# Altium PCB PCB2.PcbDoc (part 2 of 2)
Units mm, origin at the board's own origin, x right, y up, seen from the top; angles counter-clockwise.
Board outline 150 x 116.5 mm, 2 copper layers (Top Layer, Bottom Layer); 107 components, 88 nets, 407 pads, 607 vias.
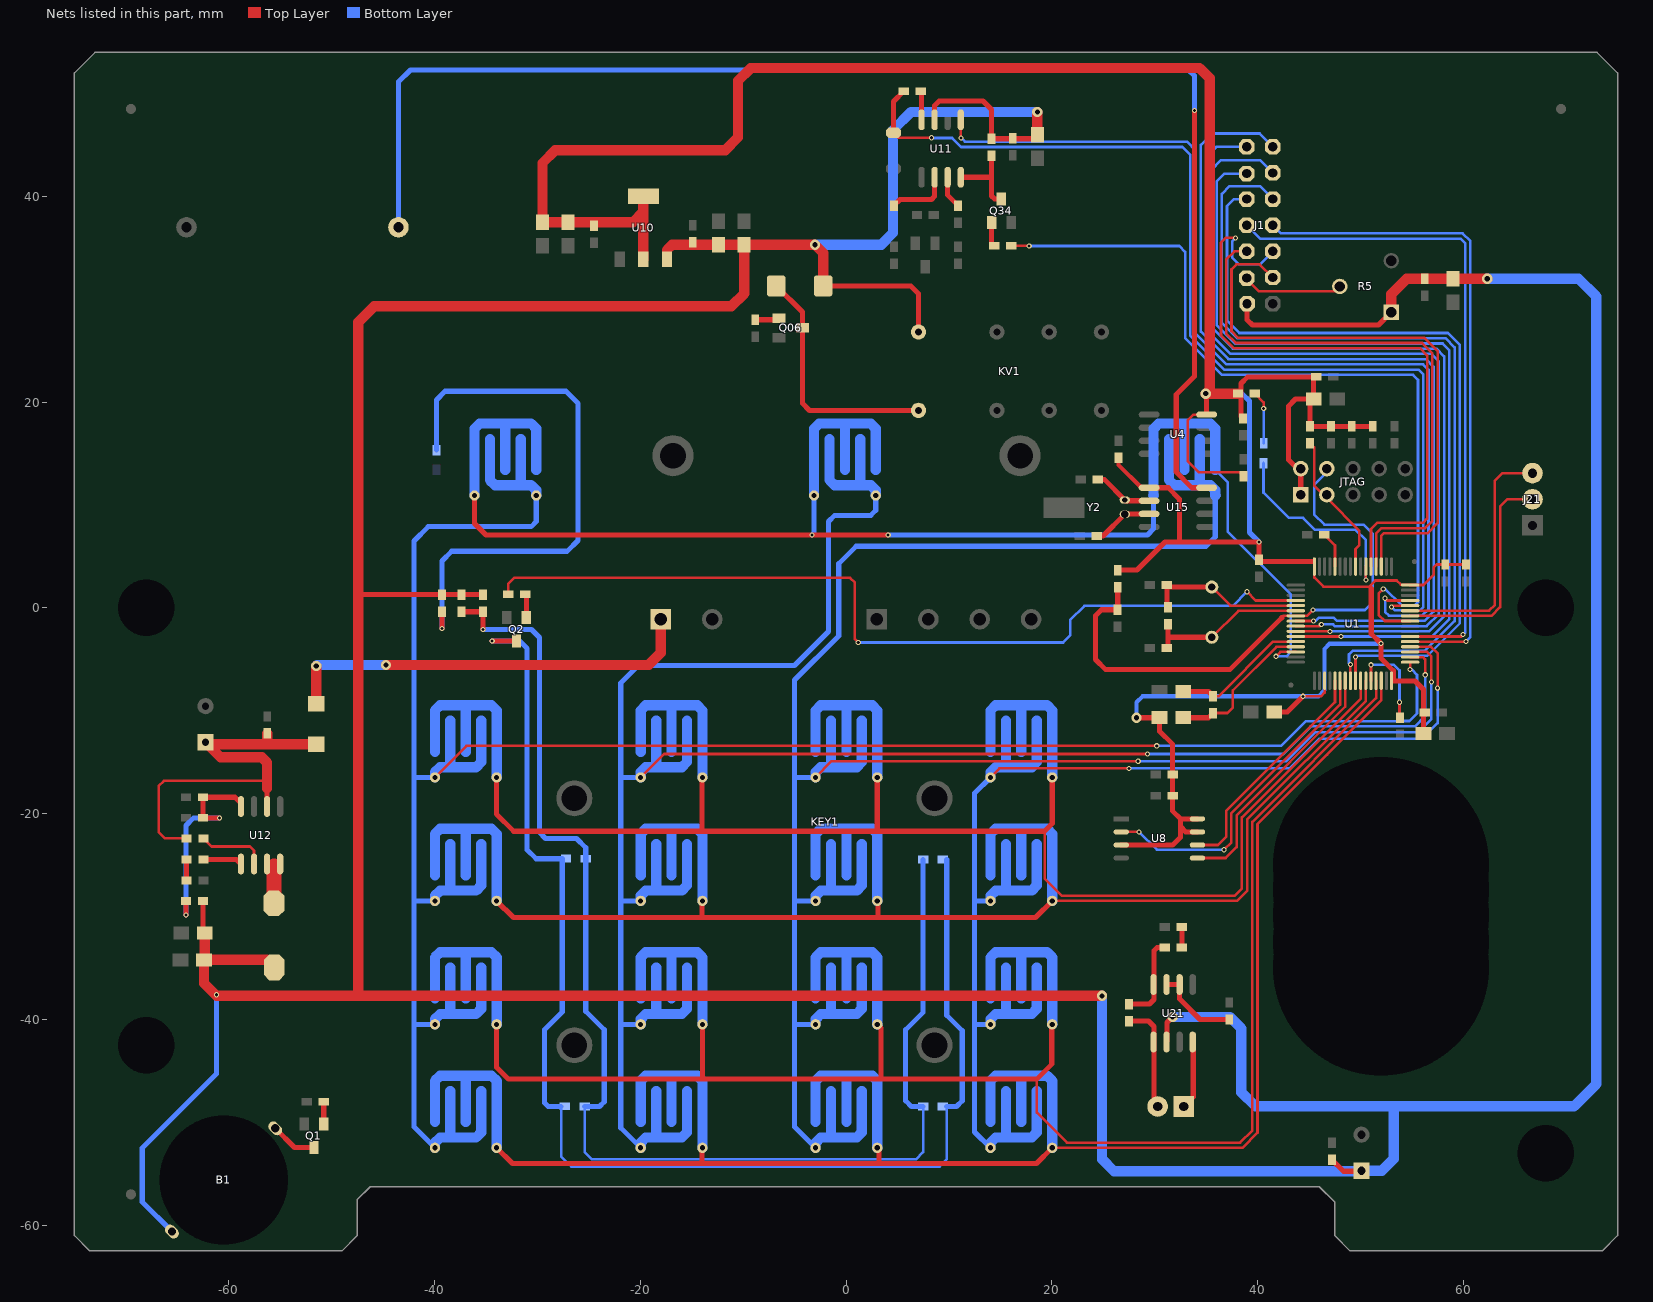
[diagram p2: the nets of this part, all layers, seen from the top]

## Via types
v1: diameter 0.5, hole 0.3, Top Layer to Bottom Layer, tented both sides, 587 vias
v2: diameter 1, hole 0.5, Top Layer to Bottom Layer, tented both sides, 20 vias

## Nets (pads, with @x,y where several pads share a name; then routed paths per layer and width w, separated by ;. In a path a pad name is that pad's centre, name@x,y a point inside that pad or via, vN(x,y) a via of type N, cw(c..) or ccw(c..) an arc to the next point about the centre after c; other vN are vias at no path point) (continued)
JTRST: JTAG.3 R3.2 U1.56 | length 14.1
  Top Layer w0.254: R3.2@45.098,15.999 45.5,15.597 45.5,11.904 46.736,10.668 46.736,10.664 49.9,7.5 49.9,6.1 49.526,5.726 U1.56@49.526,4.026
LED_LIGHT: R19.2 U1.4 | length 86.9
  Top Layer w0.255: R19.2@-32.818,1.33 -32.818,2.361 -32.258,2.921 0.406,2.921 0.864,2.464 0.864,-3.023 v1(1.194,-3.353) ; v1(38.964,1.575) 39.812,0.726 U1.4@43.726,0.726
  Bottom Layer w0.255: v1(1.194,-3.353) 21.107,-3.353 21.792,-2.668 21.792,-1.161 23.162,0.209 37.598,0.209 v1(38.964,1.575)
NetB1_2: B1.2 Q1.3 | length 4.5
  Top Layer w0.5: B1.2@-55.48,-50.58 -53.602,-52.457 Q1.3@-51.711,-52.457
NetBAT_1: BAT.1 U15.8 | length 135.1
  Top Layer w0.5: v1(33.858,48.362) 33.858,22.504 32.1,20.746 32.1,13.2 33.616,11.684 U15.8@35.052,11.684
  Bottom Layer w0.5: BAT.1@-43.5,37 -43.5,51.14 -42.342,52.299 33.299,52.299 33.858,51.74 v1(33.858,48.362)
NetC1_2: C1.2 R2.2 U1.5 Y1.1 | length 15.6
  Top Layer w0.254: Y1.1@35.56,2.032 37.366,0.226 U1.5@43.726,0.226
  Top Layer w0.5: R2.2@31.284,0.084 31.191,0.177 C1.2@31.191,2.235 31.394,2.032 Y1.1@35.56,2.032
NetC02_1: C02.1 U21.2 U21.3 | length 8.3
  Top Layer w0.5: U21.3@31.16,-36.6 U21.2@32.43,-36.6 32.43,-38.018 34.412,-40 C02.1@37.25,-40
NetC06_1: C06.1 R06.1 U21.4 | length 8.6
  Top Layer w0.5: R06.1@27.5,-38.5 29.5,-38.5 29.94,-38.06 29.94,-36.5 29.94,-33.31 30.25,-33 C06.1@31,-33
NetC06_2: C06.2 R07.2 | length 2
  Top Layer w0.5: C06.2@32.651,-33 R07.2@32.651,-31
NetC6_2: C6.2 R2.1 U1.6 Y1.2 | length 15.8
  Top Layer w0.254: Y1.2@35.56,-2.848 38.134,-0.274 U1.6@43.726,-0.274
  Top Layer w0.5: C6.2@31.284,-3.793 31.284,-2.8 ; R2.1@31.284,-1.567 31.284,-2.8 ; Y1.2@35.56,-2.848 31.332,-2.848 31.284,-2.8
NetC8_1: C8.1 L2.2 U1.13 | length 14.8
  Top Layer w0.254: C8.1@35.668,-10.216 37.084,-10.216 37.6,-9.7 37.6,-8 41.826,-3.774 U1.13@43.726,-3.774
  Top Layer w0.5: L2.2@32.766,-10.668 35.216,-10.668 C8.1@35.668,-10.216
NetC8_2: C8.2 L1.2 U1.12 | length 13.3
  Top Layer w0.254: C8.2@35.668,-8.565 35.835,-8.565 36.235,-8.565 41.526,-3.274 U1.12@43.726,-3.274
  Top Layer w0.5: L1.2@32.766,-8.128 35.231,-8.128 C8.2@35.668,-8.565
NetC17_2: C17.2 U15.2 Y2.2 | length 5.9
  Top Layer w0.5: C17.2@24.451,12.5 25.1,12.5 Y2.2@27.1,10.5 27.186,10.414 U15.2@29.464,10.414
NetC22_2: C22.2 U15.3 Y2.1 | length 6
  Top Layer w0.5: C22.2@24.384,6.985 24.985,6.985 Y2.1@27.1,9.1 27.144,9.144 U15.3@29.464,9.144
NetC41_1: C41.1 C43.2 D1.2 R116.2 U12.2 | length 40.7
  Top Layer w0.254: R116.2@-64.102,-22.4 -66.2,-22.4 -66.8,-21.8 -66.8,-17.3 -66.3,-16.8 -56.27,-16.8
  Top Layer w0.5: U12.2@-56.27,-19.3 -56.27,-17.53
  Top Layer w1: C41.1@-62.25,-13.05 C41.1@-62.05,-13.25 ; -56.27,-17.53 -56.27,-16.8 -56.27,-15.03 -56.8,-14.5 -60.8,-14.5 C41.1@-62.05,-13.25 ; -56.25,-13.1 C43.2@-56.25,-12.201 ; D1.2@-51.5,-13.25 C41.1@-62.05,-13.25
NetC44_2: C44.2 R120.1 | length 2.1
  Top Layer w0.5: C44.2@-64.102,-26.5 C44.2@-64.102,-26.5 R120.1@-64.101,-24.45
NetD05_1: D05.1 KV1.1 Q06.3 | length 24
  Top Layer w0.5: D05.1@-6.786,31.3 -4.242,28.756 Q06.3@-4.242,27.216 -4.242,19.888 -3.554,19.2 KV1.1@7.05,19.2
NetJ1_3: J1.3 R5.2 | length 9.8
  Top Layer w0.254: J1.3@38.96,32.06 38.96,31.94 40.1,30.8 47.55,30.8 R5.2@48,31.25
NetJ08_1: J08.1 U21.8 | length 6.8
  Top Layer w0.5: J08.1@32.83,-48.46 33.75,-47.54 U21.8@33.75,-42.088
NetJ08_2: J08.2 R06.2 U21.5 | length 10.6
  Top Layer w0.5: R06.2@27.5,-40.151 29.401,-40.151 29.94,-40.69 29.94,-42.088 29.94,-48.11 J08.2@30.29,-48.46
NetL5_1: L5.1 U12.7 U12.8 | length 3.6
  Top Layer w1.5: L5.1@-55.6,-28.7 -55.6,-25.1
NetLED1_1: LED1.1 LED2.1 LED3.1 LED4.1 R14.1 R15.1 | length 129.7
  Top Layer w0.5: R15.1@-37.367,-0.37 R14.1@-35.267,-0.37 v1(-35.267,-2.097)
  Bottom Layer w0.254: LED4.1@-25.4,-48.45 -25.4,-52.9 -24.7,-53.6 6.8,-53.6 7.5,-52.9 LED3.1@7.5,-48.45
  Bottom Layer w0.5: v1(-35.267,-2.097) -30.568,-2.097 -29.8,-2.864 -29.8,-21.8 -29.2,-22.4 -26.2,-22.4 -25.3,-23.3 LED2.1@-25.3,-24.384 -25.3,-39.2 -23.5,-41 -23.5,-48 -23.95,-48.45 LED4.1@-25.4,-48.45 ; LED3.1@7.5,-48.45 6.35,-48.45 5.8,-47.9 5.8,-41 7.5,-39.3 LED1.1@7.5,-24.45
NetLED1_2: LED1.2 LED2.2 LED3.2 LED4.2 Q2.3 | length 129.7
  Top Layer w0.5: v1(-34.389,-3.198) Q2.3@-32.024,-3.198 ; Q2.3@-31.995,-3.17 Q2.3@-31.895,-3.27
  Bottom Layer w0.254: LED4.2@-27.686,-48.45 -27.686,-53.314 -26.7,-54.3 9.086,-54.3 9.786,-53.6 LED3.2@9.786,-48.45
  Bottom Layer w0.5: v1(-34.389,-3.198) -31.727,-3.198 -31,-3.925 -31,-23.5 -30.116,-24.384 -27.586,-24.384 -27.586,-39.286 -29.3,-41 -29.3,-48.1 -28.95,-48.45 LED4.2@-27.686,-48.45 ; LED3.2@9.786,-48.45 10.75,-48.45 11.3,-47.9 11.3,-41.1 9.786,-39.586 LED1.2@9.786,-24.45
NetLED5_1: LED5.1 R131.1 | length 55
  Top Layer w0.5: v1(-39.268,-2.007) R131.1@-39.268,-0.356
  Bottom Layer w0.5: LED5.1@-39.802,15.342 -39.802,20.218 -38.964,21.057 -27.229,21.057 -26.06,19.888 -26.06,6.553 -27.102,5.512 -38.329,5.512 -39.268,4.572 v1(-39.268,-2.007)
NetLED8_1: LED8.1 R18.1 | length 5.2
  Top Layer w0.254: R18.1@39.751,20.828 40.6,19.979 v1(40.6,19.4)
  Bottom Layer w0.254: LED8.1@40.6,16 v1(40.6,19.4)
NetLED8_2: LED8.2 U1.54 | length 20
  Top Layer w0.254: v1(50.526,2.7) U1.54@50.526,4.026
  Bottom Layer w0.254: LED8.2@40.584,14.085 40.584,11.207 43.037,8.754 44.432,8.754 45.594,7.592 49.538,7.592 50.526,6.604 v1(50.526,2.7)
NetQ1_1: Q1.1 R16.2 | length 2.2
  Top Layer w0.5: Q1.1@-50.758,-50.171 -50.758,-48.009 R16.2@-50.749,-48
NetQ2_1: Q2.1 R19.1 | length 2.3
  Top Layer w0.5: R19.1@-31.071,1.235 Q2.1@-31.071,-0.912 Q2.1@-30.96,-0.801
NetQ06_1: Q06.1 R51.2 | length 2.1
  Top Layer w0.5: R51.2@-8.814,28.016 Q06.1@-6.68,28.016
NetQ34_1: Q34.1 R113.1 | length 2.4
  Top Layer w0.5: Q34.1@14.15,37.45 14.15,35.45 R113.1@14.4,35.2
NetQ34_3: Q34.3 R118.1 U11.8 | length 8
  Top Layer w0.5: U11.8@11.15,41.862 14.15,41.862 ; R118.1@14.15,43.95 14.15,42.45 14.15,40.05 14.464,39.736 Q34.3@15.103,39.736
NetR1_1: R1.1 U1.60 | length 3.5
  Top Layer w0.254: R1.1@46.5,7.112 47.526,6.086 U1.60@47.526,4.026
NetR9_2: R9.2 U1.28 | length 9.2
  Top Layer w0.254: U1.28@51.026,-7.074 v1(51.026,-5.526) ; v1(53.797,-9.169) 53.797,-10.617 R9.2@53.848,-10.668
  Bottom Layer w0.254: v1(51.026,-5.526) 53.253,-5.526 53.797,-6.071 v1(53.797,-9.169)
NetR110_1: R110.1 U11.4 | length 2.8
  Top Layer w0.5: R110.1@7.264,50.216 7.34,50.14 U11.4@7.34,47.45
NetR116_1: R116.1 U12.6 | length 6.7
  Top Layer w0.254: R116.1@-62.451,-22.4 -61.663,-23.188 -57.944,-23.188 -57.54,-23.591 U12.6@-57.54,-24.888
NetR120_2: R120.2 U12.5 | length 3.8
  Top Layer w0.5: R120.2@-62.45,-24.45 -59.248,-24.45 U12.5@-58.81,-24.888
NetR123_2: R123.2 R124.2 R125.1 U12.4 | length 21.5
  Top Layer w0.5: v1(-64.151,-29.851) R125.1@-64.151,-28.5 ; v1(-60.9,-20.4) R123.2@-62.5,-20.4 R124.2@-62.5,-18.4 -59.4,-18.4 -58.81,-18.99 U12.4@-58.81,-19.3
  Bottom Layer w0.5: v1(-64.151,-29.851) -64.151,-21.151 -63.4,-20.4 v1(-60.9,-20.4)
NetR126_2: R126.2 U11.7 | length 3.2
  Top Layer w0.5: U11.7@9.88,41.862 9.88,40.121 R126.2@10.9,39.101
NetR127_2: R127.2 U11.6 | length 6.2
  Top Layer w0.5: R127.2@4.65,39.101 5.249,39.7 8.3,39.7 8.61,40.01 U11.6@8.61,41.862
PA0: KEY1.33 KEY1.35 KEY1.37 U1.14 | length 101
  Top Layer w0.254: v1(41.8,-4.7) 42.226,-4.274 U1.14@43.726,-4.274
  Top Layer w0.5: KEY1.37@-36.107,10.929 -36.107,8.207 -35,7.1 v1(-3.3,7.1) v1(4.1,7.1)
  Bottom Layer w0.254: 35.893,13.429 37.1,12.222 37.1,7.432 43.242,1.29 43.242,-4.258 42.8,-4.7 v1(41.8,-4.7)
  Bottom Layer w0.5: v1(-3.3,7.1) -3.107,7.293 KEY1.35@-3.107,10.929 ; v1(4.1,7.1) 29.3,7.1 29.893,7.693 KEY1.33@29.893,10.929
PA9_U1_TX: J21.2 U1.42 | length 22.3
  Top Layer w0.254: U1.42@54.826,-0.774 57.2,-0.774 62.726,-0.774 63.576,0.076 63.576,9.881 64.26,10.564 J21.2@66.726,10.564
PA10_U1_RX: J21.1 U1.43 | length 24.5
  Top Layer w0.254: U1.43@54.826,-0.274 61.112,-0.274 ; 61.112,-0.266 62.516,-0.266 63.068,0.287 63.068,12.37 63.802,13.104 J21.1@66.726,13.104
"PA11 CAN_RX": R110.2 U1.44 ZW1.2 | length 103.7
  Top Layer w0.254: ZW1.2@4.623,46.197 5.12,45.7 v1(8.3,45.7) ; v1(53.035,0.102) 53.16,0.226 U1.44@54.826,0.226
  Top Layer w0.5: ZW1.2@4.623,46.197 4.623,49.225 R110.2@5.613,50.216
  Bottom Layer w0.254: v1@8.32,45.68 10.312,45.68 11.187,44.806 32.69,44.806 33.477,44.018 33.477,26.445 36.754,23.168 55.651,23.168 56.109,22.711 56.109,0.076 55.79,-0.242 53.379,-0.242 v1(53.035,0.102)
"PA12 CAN_TX": U1.45 U11.1 | length 98.7
  Top Layer w0.254: U11.1@11.15,47.45 11.15,45.721 v1(11.176,45.695) ; v1(52.4,0.94) 52.614,0.726 U1.45@54.826,0.726
  Bottom Layer w0.254: v1(11.176,45.695) 11.557,45.314 33.147,45.314 33.985,44.475 33.985,26.655 36.964,23.676 56.083,23.676 56.617,23.143 56.617,-0.134 56.001,-0.75 52.756,-0.75 52.4,-0.394 v1(52.4,0.94)
PB0: KEY1.1 KEY1.3 KEY1.5 KEY1.7 U1.26 | length 123.2
  Top Layer w0.254: 19.3,-21.7 19.3,-26.3 20.963,-27.963 37.803,-27.963 38.476,-27.29 38.476,-20.369 50.018,-8.827 50.018,-8.75 ; 50.026,-8.75 U1.26@50.026,-7.074
  Top Layer w0.5: KEY1.7@-33.957,-16.471 -33.957,-20.043 -32.3,-21.7 -14,-21.7 ; KEY1.5@-14,-16.514 -14,-21.7 ; 3.043,-21.657 KEY1.3@3.043,-16.471 ; KEY1.1@20.043,-16.471 20.043,-20.957 19.3,-21.7 -14,-21.7
PB1: KEY1.9 KEY1.11 KEY1.13 KEY1.15 U1.27 | length 103.1
  Top Layer w0.254: KEY1.9@20.043,-28.471 38.013,-28.471 38.984,-27.5 38.984,-20.579 50.526,-9.037 ; U1.27@50.526,-7.074 50.526,-9.037 ; 50.534,-9.029 50.526,-9.037
  Top Layer w0.5: KEY1.15@-33.957,-28.471 -32.328,-30.1 -14,-30.1 ; KEY1.13@-14,-28.514 -14,-30.1 ; KEY1.11@3.1,-28.528 3.1,-30.1 ; KEY1.9@20.043,-28.471 18.414,-30.1 3.1,-30.1 ; -14,-30.1 3.1,-30.1
PB10: KEY1.17 KEY1.19 KEY1.21 KEY1.23 U1.29 | length 148.4
  Top Layer w0.254: 18.543,-45.8 18.543,-49.043 21.463,-51.963 38.319,-51.963 39.492,-50.79 39.492,-20.79 51.518,-8.764 ; KEY1.17@20.043,-40.514 KEY1.17@20.043,-40.471 ; 51.526,-8.764 U1.29@51.526,-7.074
  Top Layer w0.5: KEY1.23@-33.957,-40.471 -33.957,-44.643 -32.8,-45.8 3.4,-45.8 ; -13.957,-45.757 KEY1.21@-13.957,-40.471 ; KEY1.19@3.043,-40.471 3.4,-40.828 3.4,-45.8 ; KEY1.17@20,-40.514 20,-44.343 18.543,-45.8 3.4,-45.8
PB11: KEY1.25 KEY1.27 KEY1.29 KEY1.31 U1.30 | length 127.6
  Top Layer w0.254: KEY1.25@20.043,-52.471 38.529,-52.471 40,-51 40,-21 46.75,-14.25 46.758,-14.25 52.018,-8.99 ; 52.026,-8.974 U1.30@52.026,-7.074
  Top Layer w0.5: KEY1.31@-33.957,-52.471 -32.428,-54 -14,-54 ; KEY1.29@-14,-52.514 -14,-54 ; KEY1.27@3.2,-52.628 3.2,-54 ; KEY1.25@20.043,-52.471 18.514,-54 3.2,-54 ; -14,-54 3.2,-54
PB12: KEY1.8 KEY1.16 KEY1.24 KEY1.32 KEY1.38 U1.33 | length 184.5
  Top Layer w0.254: KEY1.8@-39.957,-16.471 -36.886,-13.4 v1(30.2,-13.4) ; v1(54.826,-6) U1.33@54.826,-5.274
  Bottom Layer w0.254: v1(30.2,-13.4) 42.3,-13.4 44.7,-11 53.8,-11 53.808,-10.992 ; 53.8,-10.992 53.808,-10.992 ; v1(54.826,-6) 55,-6 55.5,-6.5 55.5,-10.25 54.758,-10.992 53.808,-10.992
  Bottom Layer w0.5: -41.971,-16.471 KEY1.8@-39.957,-16.471 ; KEY1.32@-39.957,-52.471 -42,-50.428 -42,-40.471 ; KEY1.24@-39.957,-40.471 -42,-40.471 ; KEY1.16@-39.957,-28.471 -42,-28.471 ; KEY1.38@-30.107,10.929 -30.107,8.393 -30.6,7.9 -40.6,7.9 -42,6.5 -42,-28.471 ; -42,-40.471 -42,-28.471
PB13: KEY1.6 KEY1.14 KEY1.22 KEY1.30 KEY1.36 U1.34 | length 176.8
  Top Layer w0.254: KEY1.6@-19.957,-16.471 -17.686,-14.2 v1(29.3,-14.2) ; U1.34@54.826,-4.774 56.074,-4.774 56.3,-5 v1(56.3,-6.5)
  Bottom Layer w0.254: v1(29.3,-14.2) 42.5,-14.2 45.2,-11.5 55.3,-11.5 56.3,-10.5 v1(56.3,-6.5)
  Bottom Layer w0.5: -21.871,-28.471 KEY1.14@-19.957,-28.471 ; -21.829,-16.471 KEY1.6@-19.957,-16.471 ; -21.771,-40.471 KEY1.22@-19.957,-40.471 ; KEY1.30@-19.957,-52.471 -21.9,-50.528 -21.9,-7.3 -20.2,-5.6 -5,-5.6 -1.7,-2.3 -1.7,8.4 -1.1,9 2.4,9 2.893,9.493 KEY1.36@2.893,10.929
PB14: KEY1.4 KEY1.12 KEY1.20 KEY1.28 KEY1.34 U1.35 | length 177.5
  Top Layer w0.254: KEY1.4@-2.957,-16.471 -1.386,-14.9 v1(28.4,-14.9) ; U1.35@54.826,-4.274 56.474,-4.274 56.9,-4.7 v1(56.9,-7.2)
  Bottom Layer w0.254: v1(28.4,-14.9) 42.8,-14.9 45.6,-12.1 55.6,-12.1 56.9,-10.8 v1(56.9,-7.2)
  Bottom Layer w0.5: -4.971,-16.471 KEY1.4@-2.957,-16.471 ; -4.871,-40.471 KEY1.20@-2.957,-40.471 ; -4.871,-28.471 KEY1.12@-2.957,-28.471 ; KEY1.28@-2.957,-52.471 -5,-50.428 -5,-7.014 -0.7,-2.714 -0.7,4.3 1,6 35,6 35.893,6.893 KEY1.34@35.893,10.929
PB15: KEY1.2 KEY1.10 KEY1.18 KEY1.26 U1.36 | length 95.7
  Top Layer w0.254: KEY1.2@14.043,-16.471 14.914,-15.6 v1(27.5,-15.6) ; U1.36@54.826,-3.774 56.874,-3.774 57.5,-4.4 v1(57.5,-7.8)
  Bottom Layer w0.254: v1(27.5,-15.6) 43.1,-15.6 46,-12.7 56,-12.7 57.5,-11.2 v1(57.5,-7.8)
  Bottom Layer w0.5: 12.529,-28.471 KEY1.10@14.043,-28.471 ; KEY1.18@14.014,-40.5 12.5,-40.5 ; KEY1.26@14.043,-52.471 12.5,-50.928 12.5,-40.5 ; KEY1.2@14.043,-16.471 12.5,-18.014 12.5,-40.5
PC0: J1.14 U1.8 | length 88
  Top Layer w0.254: U1.8@43.726,-1.274 v1(45.445,-1.274)
  Bottom Layer w0.254: J1.14@41.5,44.82 40.2,46.12 35.611,46.12 34.493,45.002 34.493,26.866 37.175,24.184 56.363,24.184 57.125,23.422 57.125,-0.356 56.222,-1.258 47.708,-1.258 47.419,-0.969 45.939,-0.969 45.634,-1.274 v1(45.445,-1.274)
PC1: J1.13 U1.9 | length 84.1
  Top Layer w0.254: U1.9@43.726,-1.774 46.026,-1.774 v1(46.2,-1.6)
  Bottom Layer w0.254: J1.13@38.96,44.82 J1.13@38.945,44.82 35.991,44.82 35.001,43.829 35.001,27.076 37.385,24.692 56.893,24.692 57.633,23.952 57.633,-0.566 56.433,-1.766 47.498,-1.766 47.332,-1.6 v1(46.2,-1.6)
PC2: J1.12 U1.10 | length 86.3
  Top Layer w0.254: U1.10@43.726,-2.274 v1(47.053,-2.274)
  Bottom Layer w0.254: J1.12@41.5,42.28 40.28,43.5 36.424,43.5 35.509,42.586 35.509,27.287 37.596,25.2 57.404,25.2 58.141,24.463 58.141,-0.813 56.679,-2.274 v1(47.053,-2.274)
PC3: J1.11 U1.11 | length 82.6
  Top Layer w0.254: U1.11@43.726,-2.774 v1(48.128,-2.774)
  Bottom Layer w0.254: J1.11@38.96,42.22 J1.11@38.945,42.22 36.779,42.22 36.017,41.458 36.017,27.497 37.806,25.708 57.985,25.708 58.649,25.044 58.649,-1.067 56.941,-2.774 v1(48.128,-2.774)
PC4: J1.10 U1.24 | length 82.8
  Top Layer w0.254: U1.24@49.026,-7.074 v1(49.026,-5.5)
  Bottom Layer w0.254: J1.10@41.5,39.74 40.24,41 37.287,41 36.525,40.238 36.525,27.707 38.017,26.216 58.268,26.216 59.157,25.327 59.157,-1.277 56.286,-4.148 49.265,-4.148 48.895,-4.518 48.895,-5.369 v1(49.026,-5.5)
PC5: J1.9 U1.25 | length 77.8
  Top Layer w0.254: U1.25@49.526,-7.074 v1(49.526,-4.779)
  Bottom Layer w0.254: J1.9@38.96,39.74 J1.9@38.945,39.74 37.719,39.74 37.033,39.054 37.033,27.918 38.227,26.724 58.496,26.724 59.665,25.556 59.665,-1.488 56.496,-4.656 49.649,-4.656 v1(49.526,-4.779)
PC6: J1.8 U1.37 | length 64.4
  Top Layer w0.254: U1.37@54.826,-3.274 v1(60.25,-3.274)
  Bottom Layer w0.254: J1.8@41.5,37.2 42.292,36.408 59.934,36.408 60.681,35.662 60.681,-2.843 v1(60.25,-3.274)
PC7: J1.7 U1.38 | length 65.3
  Top Layer w0.254: U1.38@54.826,-2.774 59.786,-2.774 v1(59.969,-2.591)
  Bottom Layer w0.254: J1.7@38.96,37.2 40.26,35.9 59.724,35.9 60.173,35.451 60.173,-2.388 v1(59.969,-2.591)
PC10: J1.4 U1.51 | length 57.3
  Top Layer w0.254: J1.4@41.485,32.12 40.204,33.4 37.948,33.4 37.465,32.917 37.465,26.899 38.106,26.258 56.21,26.258 57.508,24.96 57.508,8.258 56.5,7.25 52.25,7.25 52.026,7.026 U1.51@52.026,4.026 ; J1.4@41.493,32.127 J1.4@41.5,32.12
PC11: J1.5 U1.52 | length 55.8
  Top Layer w0.254: J1.5@38.96,34.66 J1.5@38.945,34.66 37.744,34.66 36.957,33.873 36.957,26.688 37.895,25.75 56,25.75 57,24.75 57,8.468 56.29,7.758 52.04,7.758 51.534,7.252 ; U1.52@51.526,4.026 51.526,7.252
PC12: J1.6 U1.53 | length 63.7
  Top Layer w0.254: v1(37.871,35.966) 36.906,35.966 36.449,35.509 36.449,26.478 37.685,25.242 55.79,25.242 56.492,24.54 56.492,8.679 56.079,8.266 51.624,8.266 51.026,7.668 U1.53@51.026,4.026
  Bottom Layer w0.254: v1(37.871,35.966) 37.541,35.636 37.541,34.061 38.203,33.4 40.24,33.4 J1.6@41.5,34.66
PX.Y: R113.2 U1.41 | length 81.6
  Top Layer w0.254: R113.2@16.051,35.2 17.784,35.2 v1(17.805,35.179) ; v1(52.222,1.854) 51.769,1.401 51.769,-0.664 52.379,-1.274 U1.41@54.826,-1.274
  Bottom Layer w0.254: v1(17.805,35.179) 32.41,35.179 32.969,34.62 32.969,26.234 36.544,22.66 55.115,22.66 55.601,22.174 55.601,0.559 55.308,0.266 53.988,0.266 52.4,1.854 v1(52.222,1.854)
RESET: C23.2 JTAG.4 R10.1 U1.7 | length 56.6
  Top Layer w0.254: 42.35,-0.95 42.526,-0.774 U1.7@43.726,-0.774 44.826,-0.774 v1(45.4,-0.2)
  Top Layer w0.5: C23.2@26.391,-0.178 24.822,-0.178 24.25,-0.75 24.25,-5 25.25,-6 37.3,-6 42.35,-0.95 ; C23.2@26.416,-0.152 R10.1@26.416,2.032
  Bottom Layer w0.254: v1(45.4,-0.2) 50.422,-0.2 51.206,0.584 51.206,7.194 50.3,8.1 46.5,8.1 45.5,9.1 45.5,11.972 JTAG.4@46.736,13.208
SPI1_MISO: U1.22 U8.2 | length 31.8
  Top Layer w0.254: U8.2@26.75,-21.77 v1(28.48,-21.77) ; v1(36.75,-23.5) 37.46,-22.79 37.46,-19.948 48.026,-9.382 U1.22@48.026,-7.074
  Bottom Layer w0.254: v1(28.48,-21.77) 30.21,-23.5 v1(36.75,-23.5)
SPI1_MOSI: U1.23 U8.5 | length 24.8
  Top Layer w0.254: U8.5@34.16,-24.31 36.908,-24.31 37.968,-23.25 37.968,-20.158 48.526,-9.6 U1.23@48.526,-7.074
SPI1_SCK: U1.21 U8.6 | length 22.7
  Top Layer w0.254: U8.6@34.16,-23.04 36.162,-23.04 36.952,-22.25 36.952,-19.737 47.526,-9.163 U1.21@47.526,-7.074
VCC+3.3V: C4.2 C5.1 C9.1 C10.2 C11.1 C12.2 C13.2 C14.2 C21.2 C42.2 C45.1 C46.1 C58.2 JTAG.1 JTAG.2 L2.1 R3.1 R4.2 R6.1 R7.1 R10.2 R12.2 R13.2 R18.2 R43.2 U1.19 U1.32 U1.48 U1.64 U4.8 U8.3 U8.7 U8.8 U10.2 U10.4 U15.1 | length 325.7
  Top Layer w0.254: U4.8@35.052,18.796 33.796,18.796 33.2,18.2 33.2,14.3 34.317,13.183 38.252,13.183 R13.2@38.633,12.802 R13.2@38.405,12.573 ; v1(44.413,-8.587) 46.175,-8.587 46.526,-8.236 U1.19@46.526,-7.074 ; U1.64@45.526,4.026 45.526,2.956 46.413,2.069 50.862,2.069 51.46,2.667 53.518,2.667 53.928,2.257 U1.48@54.8,2.257 ; U1.48@54.8,2.226 U1.48@54.826,2.226 56.125,2.226 57.125,3.226 57.125,3.937 57.411,4.223 C10.2@58.24,4.223 C14.2@60.272,4.223
  Top Layer w0.4: C21.2@26.5,14.599 26.5,13.9 28.716,11.684 U15.1@29.464,11.684
  Top Layer w0.5: R10.2@26.416,3.683 28.283,3.683 31.001,6.401 v1(40.157,6.401) 40.157,4.724 C12.2@40.132,4.699 40.331,4.5 45.3,4.5 ; U8.3@26.75,-23.04 31.75,-23.04 32.5,-22.29 32.5,-21.25 ; v2(28.232,-10.668) L2.1@30.48,-10.668 30.48,-11.98 31.751,-13.251 31.751,-19.751 32.5,-20.5 ; U15.1@29.464,11.684 31.316,11.684 32.4,10.6 32.4,6.462 ; U8.7@34.16,-21.77 33.02,-21.77 32.5,-21.25 ; U8.8@34.16,-20.5 32.5,-20.5 ; U4.8@35.052,18.796 v2@35.052,20.748 ; R12.2@38.6,18.415 38.4,18.615 38.4,21.824 39.04,22.464 C4.2@45.693,22.464 45.452,22.223 C5.1@45.452,20.302 45.098,19.948 R3.1@45.098,17.65 R4.2@47.13,17.65 R6.1@49.162,17.65 R7.1@51.194,17.65 ; C11.1@41.631,-10.109 42.891,-10.109 v1(44.413,-8.587) ; JTAG.2@44.196,13.208 43,14.404 43,19.6 43.702,20.302 C5.1@45.098,20.302 ; JTAG.1@44.2,11 JTAG.2@44.2,13.54 ; 51.054,1.905 51.054,-2.504 v1(52,-3.45) 52,-4.9 53.2,-6.1 53.2,-7.1 55.3,-7.1 56.134,-7.934 C9.1@56.134,-12.192 ; 32.5,-21.25 32.5,-20.5
  Top Layer w1: U10.2@-19.7,33.9 -19.7,38.5 ; U10.4@-19.7,39.996 -19.7,38.5 ; R18.2@38.1,20.828 v2(34.972,20.828) 35.357,21.213 35.357,51.486 34.366,52.476 -9.274,52.476 -10.5,51.25 -10.5,45.75 -11.75,44.5 -28.25,44.5 -29.5,43.25 C45.1@-29.5,37.5 C46.1@-27,37.5 -20.7,37.5 -19.7,38.5
  Bottom Layer w0.4: v2(28.232,-10.668) 28.232,-9.168 28.813,-8.587 v1(44.413,-8.587) 45.913,-8.587 46.5,-8 46.5,-3.978 47,-3.478 51.972,-3.478 v1(52,-3.45)
  Bottom Layer w0.5: v2(34.972,20.828) 38.506,20.828 39.218,20.117 39.218,7.341 v1(40.157,6.401)
VCC+5V: B1.1 C2.2 C07.2 C08.1 C20.1 C38.1 C39.1 C40.2 C47.2 C48.1 C50.1 C51.2 D05.2 J1.1 KV1.16 L5.2 R5.1 R14.2 R15.2 R118.2 R125.2 R131.2 U10.3 U11.3 U21.6 | length 555.5
  Top Layer w0.5: R125.2@-62.5,-28.5 -62.5,-31.414 C47.2@-62.314,-31.6 ; -47.396,1.295 R131.2@-39.268,1.295 -35.281,1.295 R14.2@-35.267,1.281 ; D05.2@-2.214,31.3 6.292,31.3 7.05,30.542 KV1.16@7.05,26.82 ; U11.3@8.61,47.45 8.61,48.818 9.068,49.276 13.31,49.276 14.15,48.436 R118.2@14.15,45.601 18.201,45.601 C48.1@18.6,46 ; U21.6@31.21,-42.088 31.21,-40.29 v2(31.75,-39.75) ; J1.1@38.985,29.58 38.985,28.515 38.985,28.015 39.5,27.5 40,27.5 51.75,27.5 R5.1@53,28.75 ; C07.2@47.25,-53.651 48.349,-54.75 C08.1@50.1,-54.75
  Top Layer w1: C50.1@-62.4,-34.2 -62.4,-36.493 -61.189,-37.704 -47.396,-37.704 ; C47.2@-62.314,-31.6 -62.314,-34.2 -56.313,-34.2 L5.2@-55.574,-34.939 ; U10.3@-17.4,33.9 -17.4,34.8 -16.9,35.3 C39.1@-12.4,35.3 C38.1@-9.9,35.3 ; D05.2@-2.214,31.3 -2.214,34.497 v2(-3.017,35.3) C38.1@-9.9,35.3 ; C48.1@18.6,46 v2(18.6,48.209) ; v2(24.892,-37.704) -47.396,-37.704 ; R5.1@53,28.75 53,30.5 54.5,32 C2.2@56.25,32 C20.1@58.983,32 v2(62.332,32) ; -47.396,-37.704 -47.396,1.295 -47.396,27.788 -45.872,29.312 -11.145,29.312 -9.9,30.556 C38.1@-9.9,35.3
  Bottom Layer w0.5: B1.1@-65.52,-60.62 -68.4,-57.741 -68.4,-52.5 -61.2,-45.3 v1(-61.2,-37.6)
  Bottom Layer w1: v2(-3.017,35.3) 3.423,35.3 4.572,36.449 4.572,46.457 6.325,48.209 v2(18.6,48.209) ; v2(24.892,-37.704) 24.892,-53.594 26.048,-54.75 C08.1@50.1,-54.75 ; v2(31.75,-39.75) 37.312,-39.75 38.43,-40.869 38.43,-47.066 39.802,-48.438 70.764,-48.438 72.923,-46.279 72.923,30.277 71.2,32 v2(62.332,32) ; C08.1@50.1,-54.7 52.082,-54.7 53.238,-53.543 53.238,-48.438
VCC+12V: D1.1 J10.1 | length 40.9
  Top Layer w1: D1.1@-51.486,-9.286 v2(-51.486,-5.639) ; v2(-44.704,-5.537) -19.177,-5.537 -18,-4.36 J10.1@-18,-1.1
  Bottom Layer w1: v2(-51.486,-5.639) -51.384,-5.537 v2(-44.704,-5.537)
pads on no net: B1. JTAG.8 KV1.8 KV1.9 U1.1 U1.15 U1.17 U1.39 U1.40 U11.5 Y2.3
copper on no net: | length 0.7
  Top Layer w0.254: 30.988,-4.064 31.284,-3.768 ; 31.284,2.244 31.496,2.032

## Polygon pours and split planes (outlines as drawn)
GND on Top Layer "Top Layer-No Net" (solid, pour order 8): -55,-18.3 -52.3,-18.3 -51.8,-18.889 -51.8,-21.247 -51.8,-24.195 -52.3,-24.784 -52.388,-24.888 -55,-24.888 -58.81,-24.888 -59.248,-24.372 -59.3,-24.31 -59.3,-21.247 -59.3,-18.878 -58.81,-18.3
GND on Top Layer "Top Layer-No Net" (solid, remove dead copper, pour order 18): -68.5,-62 -49.25,-62 -48.25,-61 -48,-60.75 -48,-59.75 -48,-57.25 -47.25,-56.5 -46.5,-55.75 -46,-55.75 46.25,-55.75 47.75,-57.25 48,-57.5 48,-58.5 48,-60.75 49,-61.75 49.25,-62 50.5,-62 73.25,-62 74.25,-61 74.5,-60.75 74.5,-60.25 74.5,51.75 73,53.25 72.75,53.5 71.5,53.5 -72.75,53.5 -73.5,52.75 -74.5,51.75 -74.5,-60.75 -73.25,-62
GND on Bottom Layer "Top Layer-No Net" (solid, pour order 10): -52.3,-18.3 -51.8,-18.8 -51.8,-24.3 -52.3,-24.8 -54.3,-24.8 -59.3,-24.8 -59.8,-24.8 -60.3,-24.3 -60.3,-19.8 -60.3,-18.8 -59.8,-18.3
GND on Bottom Layer "Top Layer-No Net" (solid, remove dead copper, pour order 20): -74.5,-60.75 -73.25,-62 -49.25,-62 -48,-60.75 -48,-57.25 -46.5,-55.75 46.25,-55.75 48,-57.5 48,-60.5 48,-60.75 49.25,-62 73.25,-62 74.5,-60.75 74.5,-59.25 74.5,51.75 72.75,53.5 -72.75,53.5 -74.5,51.75

## Other copper
Top Layer:
  rectangle net NetL5_1: -56.5,-25.7 -54.7,-24.1
  rectangle net VCC+3.3V: 40.2,4.5 45.6,4.9
  region net VCC+3.3V: 53.65,-7.15 53.9,-6.9 53.45,-6.45 53.2,-6.7
  region net VCC+3.3V: 51.02,1.406 51.206,1.592 50.656,2.142 50.47,1.956
  pour cut-out: -30.5,27.2 -25.5,27.2 -25.5,23.2 -30.5,23.2
  pour cut-out: -2,27.2 3,27.2 3,23.2 -2,23.2
  pour cut-out: 27.5,27.2 32.5,27.2 32.5,23.2 27.5,23.2
  pour cut-out: 27.5,51.2 32.5,51.2 32.5,47.2 27.5,47.2
  pour cut-out: -2,51.2 3,51.2 3,47.2 -2,47.2
  pour cut-out: -30.5,51.2 -25.5,51.2 -25.5,47.2 -30.5,47.2
Bottom Layer:
  pour cut-out: -30.5,51.2 -25.5,51.2 -25.5,47.2 -30.5,47.2
  pour cut-out: -2,51.2 3,51.2 3,47.2 -2,47.2
  pour cut-out: 27.5,51.2 32.5,51.2 32.5,47.2 27.5,47.2
  pour cut-out: 27.5,27.2 32.5,27.2 32.5,23.2 27.5,23.2
  pour cut-out: -2,27.2 3,27.2 3,23.2 -2,23.2
  pour cut-out: -30.5,27.2 -25.5,27.2 -25.5,23.2 -30.5,23.2

## Silkscreen, mask and mechanical layers (free items; w line width, h text height)
Top Overlay:
  circle w0.1: c-66.424,-61.598 r0.671
  circle w0.1: c-60.5,-55.6 r6.5
  circle w0.1: c-26.4,-18.5 r2.5
  circle w0.1: c8.6,-18.5 r2.5
  circle w0.1: c-26.4,-42.5 r2.5
  circle w0.1: c8.6,-42.5 r2.5
  circle w0.1: c-16.9,14.8 r3
  circle w0.1: c16.9,14.8 r3
  rectangle: -59.357,-33.3 -51.857,-30.3
  lines w0.1: 68.8,9.3 70.7,9.3 ; 68.8,11.9 70.7,11.9 ; 68.8,5.7 70.7,5.7 70.7,15.1 68.8,15.1 68.8,5.7
  lines w0.15: -15.5,3.55 -15.5,5.8 ; 4.9,3.5 4.9,5.75 ; 9,3.5 9,5.75 ; 15,3.5 15,5.75 ; -20.5,3.5 -20.5,5.8 -10.5,5.8 -10.5,3.5 -20.5,3.5 ; 0.5,3.5 20.5,3.5 20.5,5.8 0.5,5.8 0.5,3.5
  lines w0.254: 25,5.2 25,-25 -25,-25 -25,25 25,25
  lines w0.5: 43.4,12 55.1,12 ; 47,9.1 51.6,9.1
  lines w1.5: 34.1,-4.4 34.1,3.6 ; 37,-4.4 37,3.6
  text "RX" at 70.3,12.6 h1 r90
  text "TX" at 70.3,9.7 h1 r90
  text "GND" at 70.3,6.1 h1 r90
  text "12V" at -19.5,4 h2
  text "GND" at -15,4 h2
  text "HIN" at 1,4 h2
  text "LIN" at 5.4,4 h2
  text "HOUT" at 9.5,4 h2
  text "LOUT" at 15.4,4 h2
  text "e-lin technology" at -22.4,-11 h6
  text "Security  terminal V1.3" at -19.3,-15 h3.5
  text "20150330" at -7.8,-19.5 h3
  text "SPK+" at 36.195,-48.793 h1.5
  text "SPK-" at 21.641,-48.92 h1.5
  text "+" at -66.218,-62.535 h2.5 r48
Bottom Overlay:
  lines w0.254: -58.5,49.6 -58.5,24.6 58.5,24.6 58.5,49.6 ; -51.54,-44.831 -50.39,-44.831 ; -50,24.85 -50,49.85 ; -49.55,-48 -49.55,-4.9 26.51,-4.9 26.51,-56 ; -48.35,-47.95 -48.35,-23.2 ; -48.35,-6.1 19,-6.1 ; -27.05,-55.1 25.31,-55.1 25.31,-15.9 25.31,-6.3 ; 50,24.35 50,49.35
  text "13" at 39.8,45.8 h2
  text "14" at 42.3,45.8 h2
  text "注：继电器管脚要剪短" at 26,29.75 h2.5
  text "1" at 39.3,27.4 h2
  text "2" at 42,27.4 h2
Mechanical 1:
  lines w0.254: -48.625,-62.125 -49,-62.5 ; -47.875,-61.375 -47.5,-61 ; 47.719,-61.219 47.5,-61 ; -75,-61 -75,-61 ; -75,-61 -73.5,-62.5 -49,-62.5 ; -75,-61 -75,52 -73,54 73,54 75,52 75,-61 73.5,-62.5 ; -49,-62.5 -49,-62.5 ; -49,-62.5 -47.5,-61 ; -47.5,-61 -47.5,-57.5 -46.25,-56.25 46,-56.25 47.5,-57.75 47.5,-61 ; 47.5,-61 47.5,-61 ; 47.5,-61 49,-62.5 73.5,-62.5 ; 73.5,-62.5 73.5,-62.5

## Text inside footprints (layer, text, board x,y; h text height)
KEY1: Bottom Overlay "A" at 37.1,14.2 h1; Bottom Overlay "B" at 5,14.3 h1; Bottom Overlay "C" at -28.1,14.2 h1; Bottom Overlay "1" at 22.2,-13.132 h1; Bottom Overlay "2" at 5.182,-13.208 h1; Bottom Overlay "3" at -11.659,-13.386 h1; Bottom Overlay "4" at 21.971,-25 h1; Bottom Overlay "5" at 5.131,-25 h1; Bottom Overlay "6" at -11.811,-25 h1; Bottom Overlay "7" at 22.022,-37.389 h1; Bottom Overlay "8" at 5.131,-37.16 h1; Bottom Overlay "9" at -11.786,-37.16 h1; Bottom Overlay "*" at 21.895,-49.149 h1; Bottom Overlay "0" at 5.105,-49.2 h1; Bottom Overlay "#" at -11.811,-48.971 h1; Bottom Overlay "F1" at -30.988,-13.386 h1; Bottom Overlay "F2" at -30.886,-25.349 h1; Bottom Overlay "F3" at -31.064,-37.338 h1; Bottom Overlay "F4" at -30.836,-49.555 h1